# Altium PCB programmer.PcbDoc
Units mil, origin at the board's own origin, x right, y up, seen from the top; angles counter-clockwise.
Board outline 1900 x 1900 mil, 2 copper layers (Top Layer, Bottom Layer); 34 components, 39 nets, 151 pads, 49 vias.
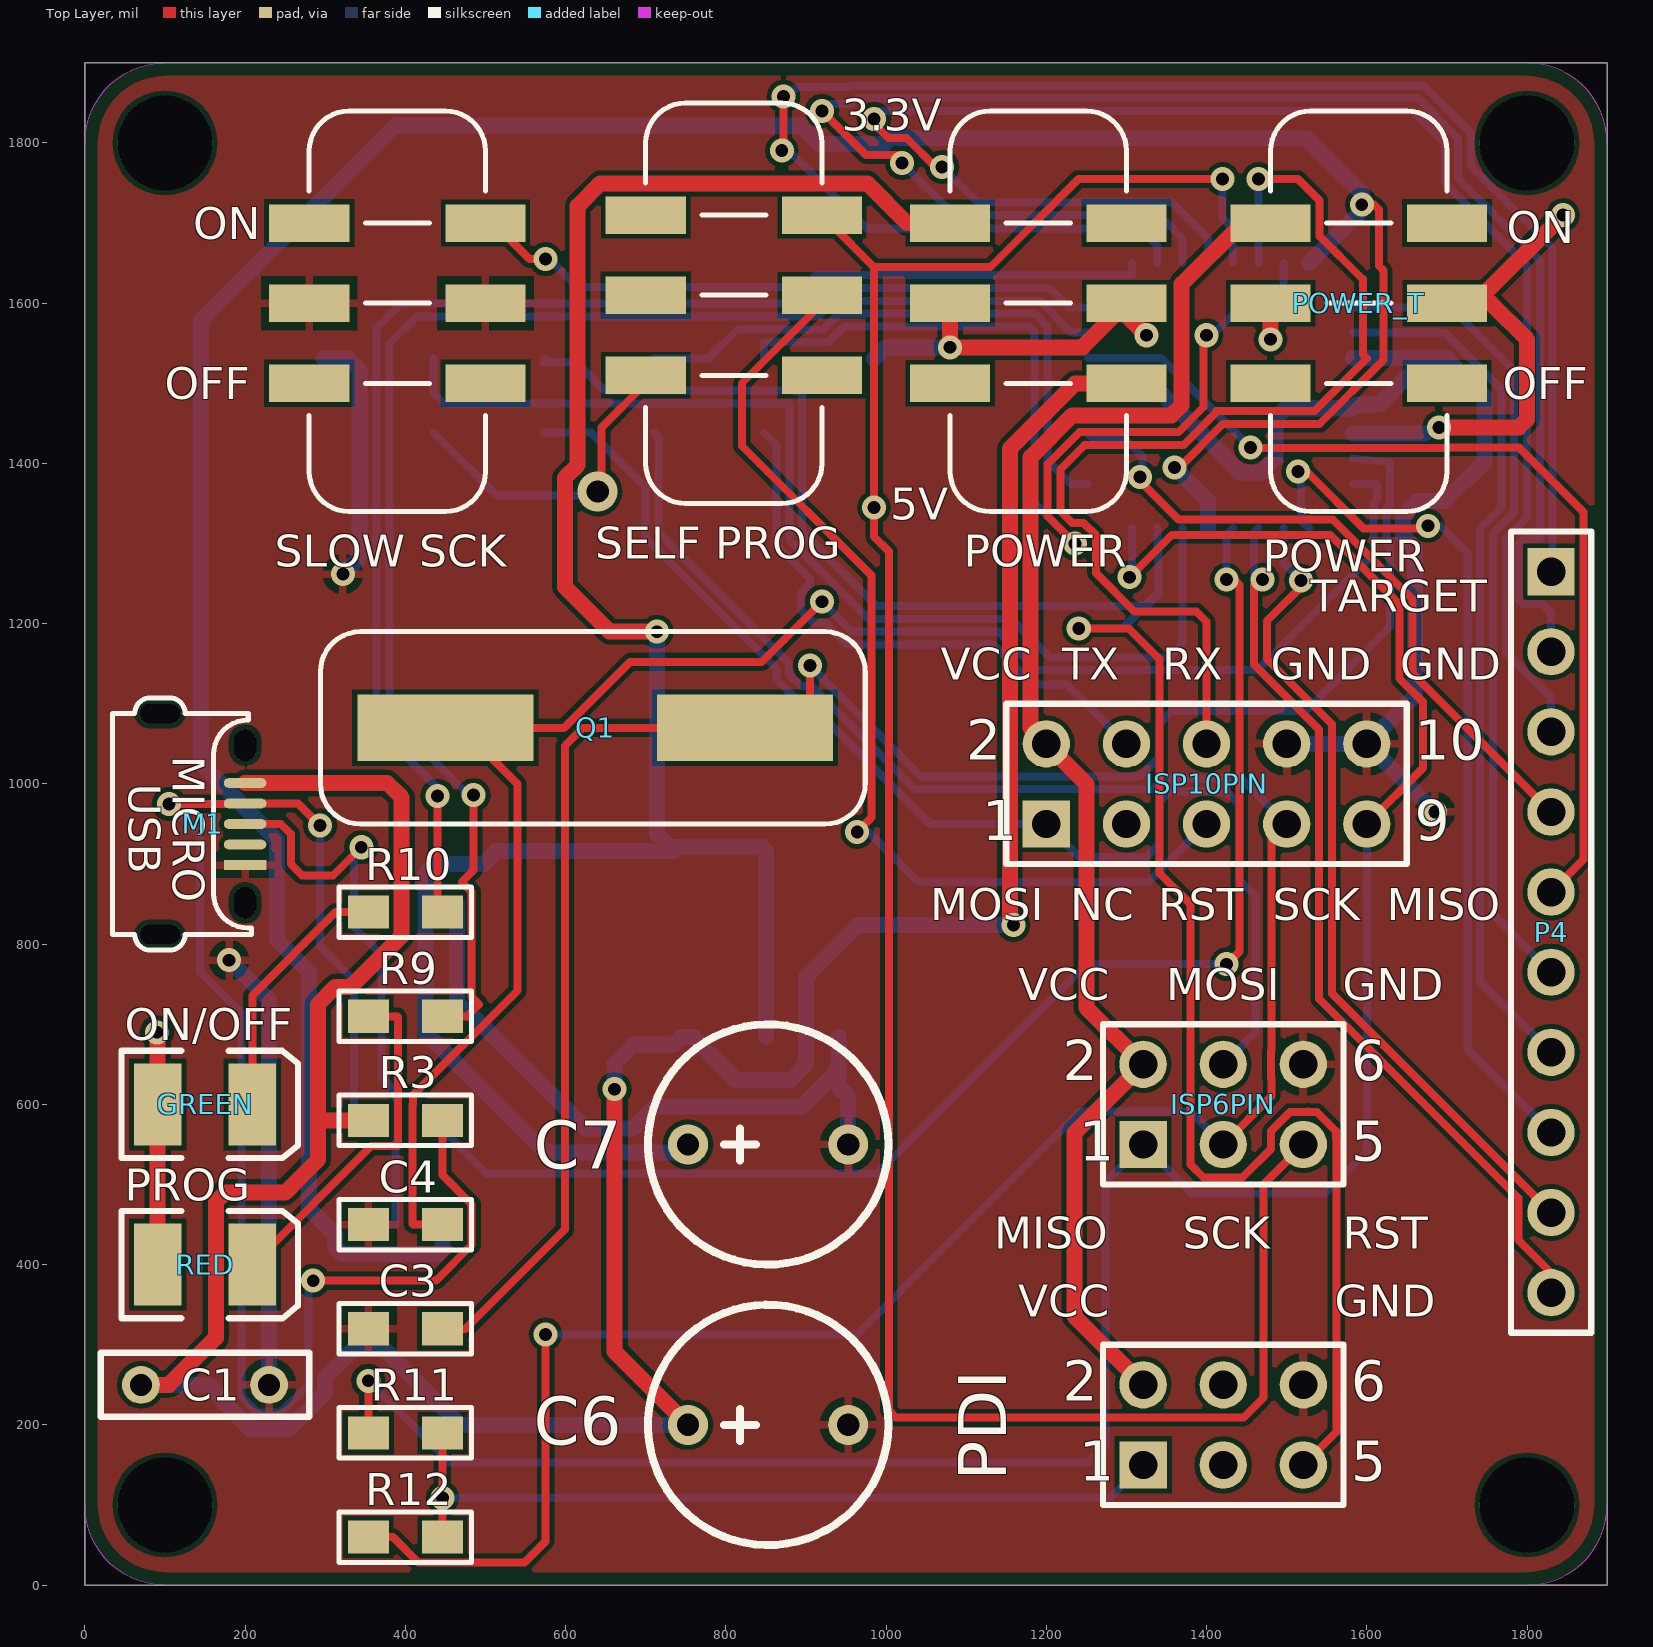
[diagram p0: Top Layer view]
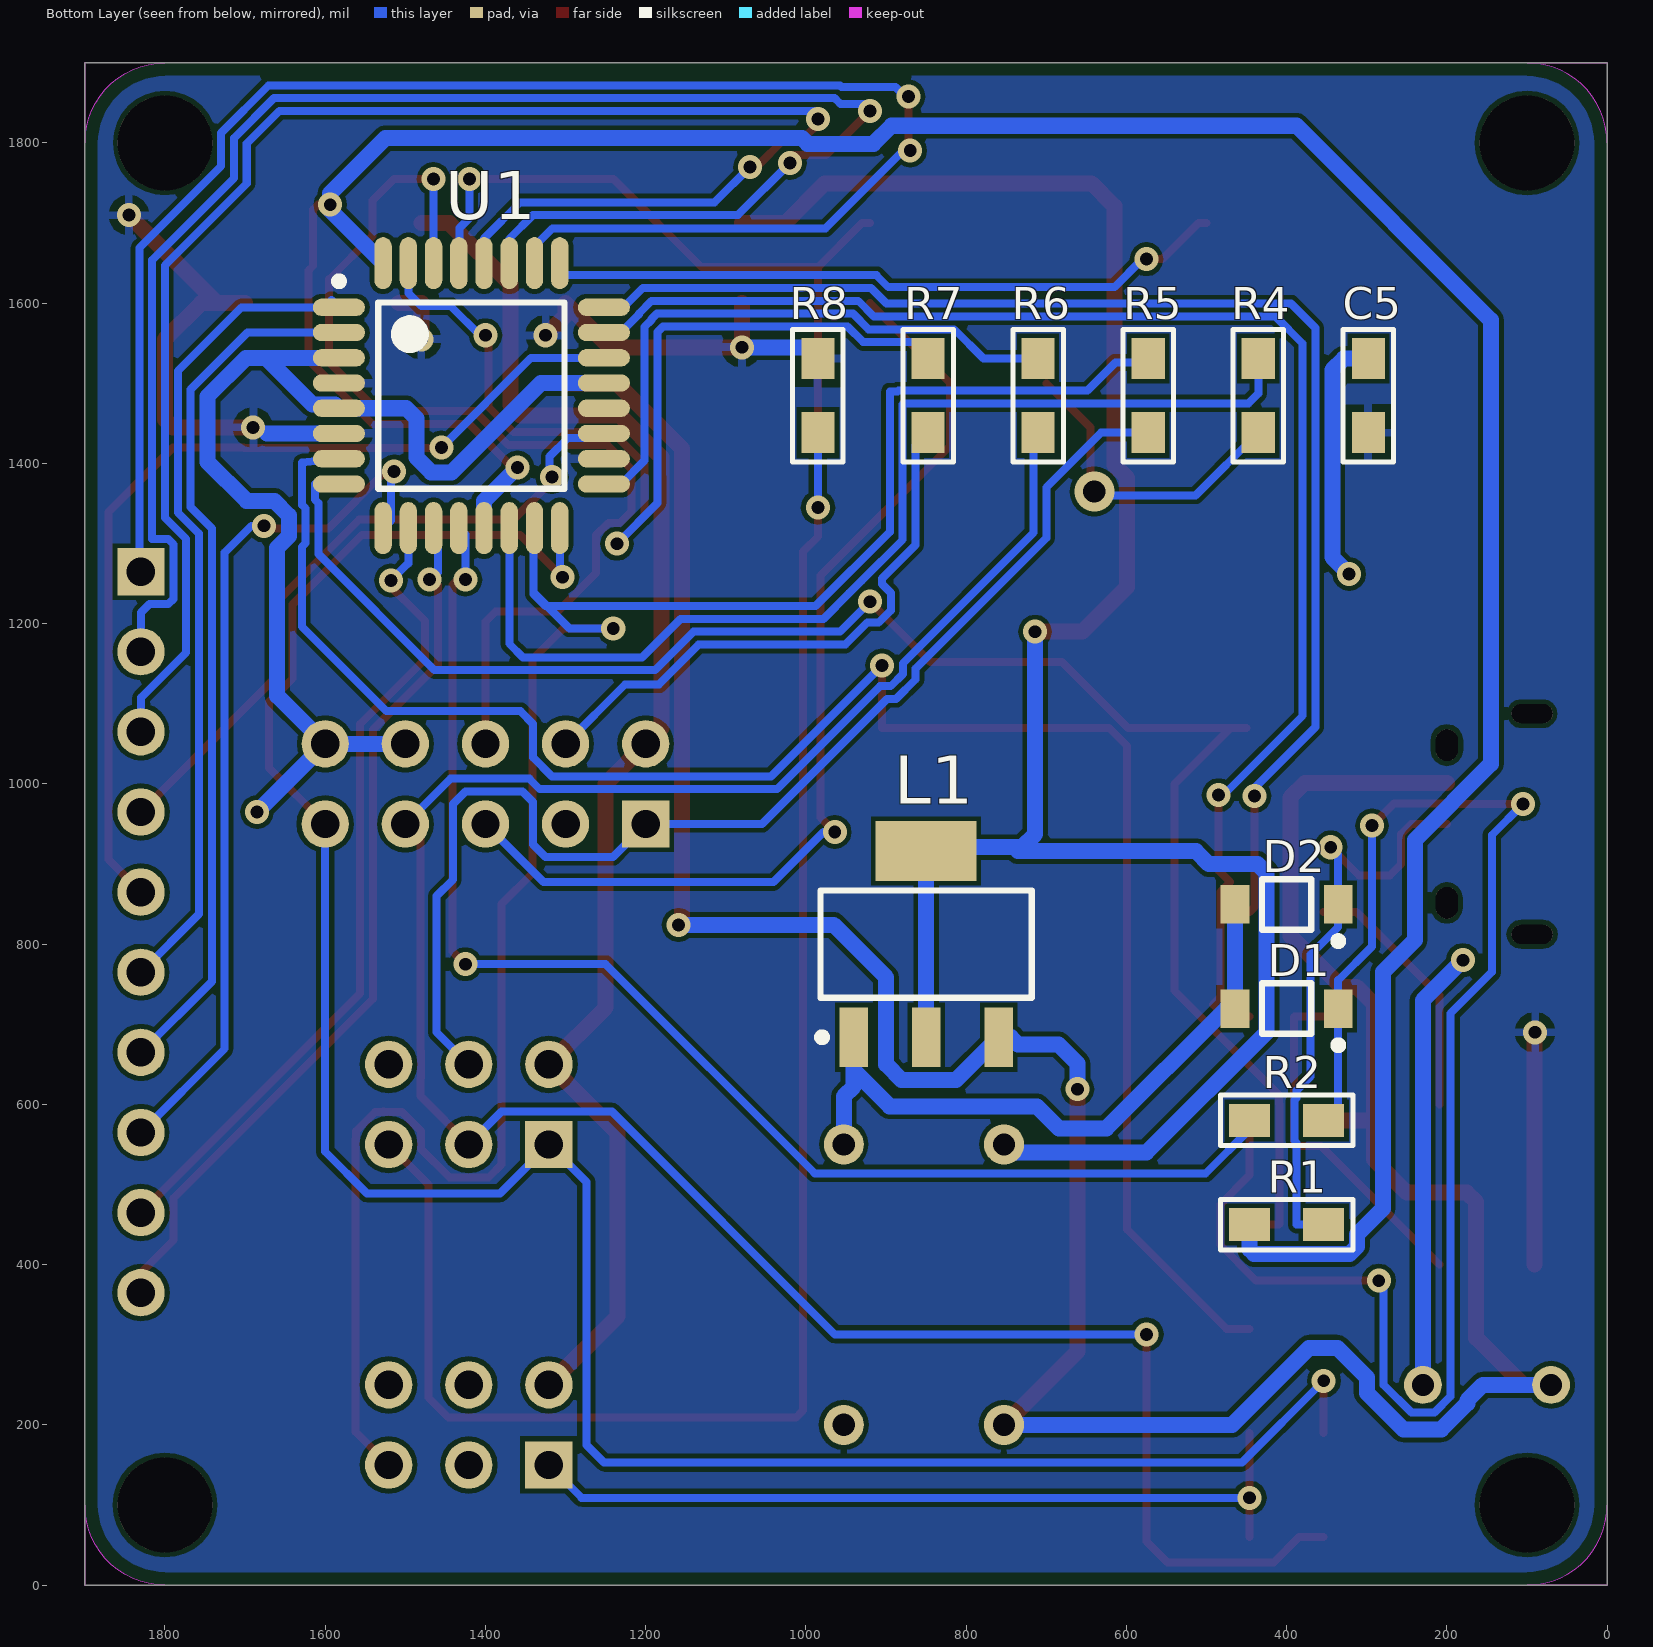
[diagram p1: Bottom Layer view, seen from below]

## Layer stack, top to bottom
Top Solder: solder mask 0.4, Solder Resist, Dk 3.5
Top Layer: signal copper 1.4
Dielectric 1: dielectric 12.6, FR-4, Dk 4.8
Bottom Layer: signal copper 1.4
Bottom Solder: solder mask 0.4, Solder Resist, Dk 3.5

## Board outline
0,0 0,1900 1900,1900 1900,0
cut-out: 0,1800 cw(c100,1800) 100,1900 0,1900
cut-out: 1900,1800 ccw(c1800,1800) 1800,1900 1900,1900
cut-out: 1800,0 ccw(c1800,100) 1900,100 1900,0
cut-out: 100,0 cw(c100,100) 0,100 0,0

## Design rules (kind name [scope] priority, off if disabled: settings)
BoardOutlineClearance [All] p1: gap=16
Clearance [All] p1: gap=6
HoleSize [All] p1: absolutevalues=TRUE maxlimit=248.03 minlimit=11.81 maxpercent=80.000 minpercent=20.000
MinimumAnnularRing [All] p1: minimumring=6
MinimumSolderMaskSliver [All] p1: minsoldermaskwidth=5
PolygonConnect [All] p1: connectstyle=Relief reliefconductorwidth=10 reliefentries=4 polygonreliefangle="90 Angle" airgapwidth=10
RoutingVias [All] p1: holewidth=16 width=30 viastyle="Through Hole" minholewidth=16 minwidth=30 maxholewidth=28 maxwidth=50
SilkToSilkClearance [All] p1: silktosilkclearance=0
SolderMaskExpansion [All] p1: expansion=4
Width [All] p1: maxlimit=30 minlimit=6 preferedwidth=10
27 further rules are at their usual default settings.

## Components (designator, comment, footprint, x,y, rotation, side; value= is the part's Value field where it differs from the comment)
C1 "CAP" CAP4 150,250 r0 top
C3 "CAP" 0805 400,320 r180 top
C4 "CAP" 0805 400,450 r180 top
C5 "CAP" 0805 298,1484.65 r90 bottom
C6 "CAP5" CAP5 852.76,200 r180 top
C7 "CAP5" CAP5 852.76,550 r180 top
D1 "3.6V" ONSC-SOD-123-2-425-04_V 400,719.55 r0 bottom
D2 "3.6V" ONSC-SOD-123-2-425-04_V 400,849.55 r0 bottom
GREEN "LED3" 3.5X2.8X1.9 150,600 r0 top
ISP6PIN "Header 3X2" HDR2X3 1320.83,550 r0 top
ISP10PIN "Header 5X2" HDR2X5 1200,950 r0 top
L1 "AZ1117CH" SOT-223-DB3_L 850,800 r90 bottom
M1 "uUSB_I" MICROUSB_B 200,950 r270 top
P4 "Header 10" HDR1X10 1830,1265 r270 top
PDI "Header 3X2" HDR2X3 1320.83,150 r0 top
POWER "TOGGLE SWITCH" "TOGGLE SWITCH" 1300,1700 r270 top
POWER_T "TOGGLE SWITCH" "TOGGLE SWITCH" 1700,1700 r270 top
Q1 "XTAL" CRYSTAL 824,1070 r180 top
R1 "RES" 0805 400,450 r0 bottom
R2 "RES" 0805 400,580 r0 bottom
R3 "RES" 0805 400,580 r0 top
R4 "RES" 0805 435.4,1484.65 r90 bottom
R5 "RES" 0805 572.8,1484.65 r90 bottom
R6 "RES" 0805 710.2,1484.65 r90 bottom
R7 "RES" 0805 847.6,1484.65 r90 bottom
R8 "RES" 0805 985,1484.65 r90 bottom
R9 "RES" 0805 400,710 r0 top
R10 "RES" 0805 400,840 r0 top
R11 "RES" 0805 400,190 r180 top
R12 "RES" 0805 400,60 r180 top
RED "LED3" 3.5X2.8X1.9 150,400 r0 top
"SELF PROG" "TOGGLE SWITCH" "TOGGLE SWITCH" 920,1710 r270 top
"SLOW SCK" "TOGGLE SWITCH" "TOGGLE SWITCH" 500,1700 r270 top
U1 "ATmega8-16AI" 32A_N 1417.49,1484.65 r180 bottom

## Footprints (in the part's own frame and the unit in brackets; to place one, negate y for a bottom-side part, rotate by r counter-clockwise, add the part's x,y. Pads: shape width x height; smd on the part's side, far side on the other; paste and mask are expansions set on the pad)
3.5X2.8X1.9 [mm] "SM LED; 2 C-Bend Leads; Body 3.5 x 2.8 x 1.9 mm, inc leads (LxWxH typ)"
  rect 1.5x2.6 smd: 1(-1.5,0) 2(1.5,0)
  silkscreen extent -2.65,-1.7 2.95,1.7
32A_N [mm] "Thin QFP, 32-Leads, Body 7x7mm, Pitch 0.8mm, IPC Medium Density"
  oval 1.65x0.55 smd: 1(-4.2,2.8) 2(-4.2,2) 3(-4.2,1.2) 4(-4.2,0.4) 5(-4.2,-0.4) 6(-4.2,-1.2) 7(-4.2,-2) 8(-4.2,-2.8) 17(4.2,-2.8) 18(4.2,-2) 19(4.2,-1.2) 20(4.2,-0.4) 21(4.2,0.4) 22(4.2,1.2) 23(4.2,2) 24(4.2,2.8)
  oval 0.55x1.65 smd: 9(-2.8,-4.2) 10(-2,-4.2) 11(-1.2,-4.2) 12(-0.4,-4.2) 13(0.4,-4.2) 14(1.2,-4.2) 15(2,-4.2) 16(2.8,-4.2) 25(2.8,4.2) 26(2,4.2) 27(1.2,4.2) 28(0.4,4.2) 29(-0.4,4.2) 30(-1.2,4.2) 31(-2,4.2) 32(-2.8,4.2)
  silkscreen extent -4.33,-2.95 2.95,3.75, body extent -3.5,-3.5 3.5,3.5, height 1.2
0805 [mm]
  rect 1.3x1.05 smd: 1(-1.175,0) 2(1.175,0)
  silkscreen extent -2.1,-0.8 2.1,0.8
CAP4 [mm] "Radial Cap, Thru-Hole; 2 Leads; 4mm Pin Spacing"
  round 1.2 hole 0.7: 1(-2.032,0) 2(2.032,0)
  silkscreen extent -3.3,-1.02 3.3,1.02
CAP5 [mil]
  round 50 hole 28: 1(-100,0) 2(100,0)
  silkscreen extent -150,-150 150,150
CRYSTAL [mil]
  rect 220x83 smd: 1(0,0) 2(374,0)
  silkscreen extent -150,-120 530,120
HDR1X10 [mm] "Connector; Header; 10 Position"
  rect 1.5x1.5 hole 0.9: 1(0,0)
  round 1.5 hole 0.9: 2(2.54,0) 3(5.08,0) 4(7.62,0) 5(10.16,0) 6(12.7,0) 7(15.24,0) 8(17.78,0) 9(20.32,0) 10(22.86,0)
  silkscreen extent -1.27,-1.27 24.13,1.27
HDR2X3 [mm] "Connector; Header; 3x2 Position"
  rect 1.5x1.5 hole 0.9: 1(0,0)
  round 1.5 hole 0.9: 2(0,2.54) 3(2.54,0) 4(2.54,2.54) 5(5.08,0) 6(5.08,2.54)
  silkscreen extent -1.27,-1.27 6.35,3.81
HDR2X5 [mm] "Connector; Header; 5x2 Position"
  rect 1.5x1.5 hole 0.9: 1(0,0)
  round 1.5 hole 0.9: 2(0,2.54) 3(2.54,0) 4(2.54,2.54) 5(5.08,0) 6(5.08,2.54) 7(7.62,0) 8(7.62,2.54) 9(10.16,0) 10(10.16,2.54)
  silkscreen extent -1.27,-1.27 11.43,3.81
MICROUSB_B [mm] "Micro USB Type B Footprint"
  oval 0.305x1.35 smd mask+0.102: 1:VCC(-1.3,0) 2:RX(-0.65,0) 3:TX(0,0) 4:NC(0.65,0)
  rect 0.305x1.35 smd mask+0.102: 5:GND(1.3,0)
  rrect100% 0.6x1.3 hole 0.6 slot 1.3 at 90 deg unplated: hole(-3.5,-2.7) hole(3.5,-2.7)
  rrect100% 1x0.7 hole 0.7 slot 1 at 0 deg unplated: hole(-2.5,0) hole(2.5,0)
  silkscreen extent -4,-4.2 4,0.2
ONSC-SOD-123-2-425-04_V [mm] "SOD, 2-Leads, Body 2.69x1.6mm"
  rect 0.91x1.22 smd: 1(-1.635,0) 2(1.635,0)
  silkscreen extent -1.76,-0.8 0.78,1.28, body extent -1.35,-0.8 1.35,0.8, height 1.35
SOT-223-DB3_L [mm] "SOT223, 4-Leads, Body 6.5x3.5mm, Pitch 2.3mm, Lead Span 7mm, IPC High Density"
  rect 1.9x0.9 smd: 1(-2.95,2.3) 2(-2.95,0) 3(-2.95,-2.3)
  rect 1.9x3.2 smd: 4(2.95,0)
  silkscreen extent -3.07,-3.35 1.7,3.43, body extent -1.85,-3.35 1.85,3.35, height 1.8
"TOGGLE SWITCH" [mil]
  rect 47x100 smd: 1(0,0) 1(0,-220) 2(100,0) 2(100,-220) 3(200,0)
  rect 47x100 smd mask+4: 3(200,-220)
  silkscreen extent -140,-220 360,0

## Part data
C1 C3 C4 C5: "Capacitor - Imperial Units"
C6 C7: "Aluminum Capacitor - Imperial Units"
D1 D2: library part MMSZ4685T1G, "Zener Voltage Regulator, 500 mW, 2-Pin SOD-123, Pb-Free, Tape and Reel"
GREEN RED: "Typical BLUE SiC LED"
ISP6PIN PDI: "Header, 3-Pin, Dual row"
ISP10PIN: "Header, 5-Pin, Dual row"
L1: "Low Dropout Voltage Regulator - Imperial Units"
M1: "Micro USB Type B - Imperial Units"
P4: "Header, 10-Pin"
POWER POWER_T "SELF PROG" "SLOW SCK": "Toggle Switch - Imperial Units"
Q1: "Crystal Oscillator - Imperial Units"
R1 R2 R3 R4 R5 R6 R7 R8 R9 R10 R11 R12: "Resistor - Imperial Units"
U1: "8-Bit AVR Microcontroller with 8K Bytes of In-System Programmable Flash Memory"

## Free pads (board coordinates)
  round 118.11 hole 118.11 unplated: Hole(100,100) Hole(100,1800) Hole(1800,100) Hole(1800,1800)

## Via types
v1: diameter 30, hole 16, Top Layer to Bottom Layer, 48 vias
v2: diameter 50, hole 28, Top Layer to Bottom Layer, 1 vias

## Nets (pads, with @x,y where several pads share a name; then routed paths per layer and width w, separated by ;. In a path a pad name is that pad's centre, name@x,y a point inside that pad or via, vN(x,y) a via of type N, cw(c..) or ccw(c..) an arc to the next point about the centre after c; other vN are vias at no path point)
3.3V: C7.2 L1.2 L1.4 POWER.1 | length 2661.4
  Top Layer w20: v1(714,1190) 655,1190 599,1246 599,1381.98 615,1397.98 615,1721.13 643.37,1749.5 976.63,1749.5 1026.13,1700 POWER.1@1080,1700
  Bottom Layer w20: v1(714,1190) 714,937.5 730.36,921.14 845,921.14 L1.4 L1.2 ; 735.36,916.14 513.14,916.14 497,900 436.19,900 425,888.81 425,690 575,540 742.76,540 C7.2
5V: C1.1 C6.2 L1.3 M1.1:VCC POWER.3 R3.1 | length 3952.3
  Top Layer w20: C1.1 105,250 163.53,308.53 163.53,478.53 175,490 250,490 291,531 291,580 ; M1.1:VCC 377.32,1001.18 395.33,983.17 395.33,810.33 331.67,746.67 312.67,746.67 291,725 291,580 ; R3.1 291,580 ; v1(661,619) 661,291.76 C6.2 ; v1(1159,824) 1154.47,828.53 1154.47,1418.59 1235.88,1500 POWER.3@1300,1500
  Bottom Layer w20: C1.1 155,250 174.38,230.62 174.38,226.96 206.96,194.38 254.38,194.38 300,240 300,259.24 336.76,296 372,296 468,200 C6.2 ; v1(661,619) 661,651 685,675 735.45,675 744.31,683.86 L1.3 812.85,630.46 880.46,630.46 900,650 900,758.5 965.5,824 v1(1159,824)
DATA+: R2.2 U1.12 | length 1687.2
  Top Layer w10: v1(1425,775) 1441,791 1441,1248.24 1434.24,1255 v1(1425,1255)
  Bottom Layer w10: R2.2 446.26,568.74 501,514 989,514 1250,775 v1(1425,775) ; v1(1425,1255) 1425,1311.06 U1.12
DATA-: R1.2 U1.13 U1.32 | length 3724.7
  Top Layer w10: v1(1360,1395) 1366.08,1395 1420.58,1449.5 1541.18,1449.5 1621,1529.32 1621,1640.77 1615,1646.77 1615,1716.78 1608.85,1722.93 v1(1593.78,1722.93)
  Bottom Layer w20: R1.2 446.26,419 440.59,413.33 321.52,413.33 312.15,422.7 312.15,437.85 280,470 280,765 240,805 240,930 145,1025 145,1579 387.49,1821.49 893.21,1821.49 915.7,1799 997.84,1799 1004.84,1806 1525,1806 1593.78,1737.22 v1(1593.78,1722.93) 1593.78,1716.06 U1.32 ; v1(1360,1395) 1401.74,1353.26 U1.13
GND: "SLOW SCK.2" C1.2 C3.2 C4.2 C5.2 C6.1 C7.1 D1.2 D2.2 ISP6PIN.6 ISP10PIN.8 ISP10PIN.10 L1.1 M1.5:GND PDI.6 U1.3 U1.5 U1.21 | length 3189.3
  Bottom Layer w20: v1(180,780) 230,730 C1.2 ; C5.2 329,1530.91 343,1516.91 343,1283 v1(322,1262) ; D2.2 D1.2 475.45,719.55 625,570 684.25,570 711.79,597.54 895.54,597.54 940.55,642.55 ; L1.1 940.55,642.55 ; C7.1 952.76,610 940.55,622.2 940.55,642.55 ; U1.21 1330.77,1500.39 1442.16,1389 1467.84,1389 1486,1407.16 1486,1456 1498.9,1468.9 U1.5 1587.51,1473.57 1615.61,1473.57 1673.93,1531.89 ; ISP10PIN.8 ISP10PIN.10 ; U1.3 1673.93,1531.89 ; v1(1685,965) ISP10PIN.10 ; ISP10PIN.10 1660,1110 1660,1294.68 1645.31,1309.37 1645.31,1335.05 1663.47,1353.21 1698.21,1353.21 1747,1402 1747,1483.57 1698.68,1531.89 1673.93,1531.89
MISO: ISP6PIN.1 ISP10PIN.9 R11.2 U1.16 | length 2938.6
  Top Layer w10: R11.2 v1(353.74,255) ; v1(1304,1258) 1357,1311 1554,1311 1641,1224 1641,1131.37 1670,1102.37 1670,1020 ISP10PIN.9
  Bottom Layer w10: v1(353.74,255) 455.74,153 1252,153 1274,175 1274,503.17 ISP6PIN.1 1381.83,489 1548,489 1600,541 ISP10PIN.9 ; v1(1304,1258) 1307.25,1261.25 U1.16
MOSI: PDI.5 R5.2 U1.15 | length 2652.8
  Top Layer w10: v1(1240.5,1194) 1303,1194 1341,1156 1341,889 1380,850 1380,525 1396,509 1445,509 1480.3,544.3 1480.3,566.79 1504.04,590.53 1526.53,590.53 1527,591 1527.47,590.53 1537.61,590.53 1561.35,566.79 1561.35,556.65 1562,556 1562,191.17 PDI.5
  Bottom Layer w10: R5.2 572.8,1526 613.5,1526 648.52,1490.98 884.63,1490.98 885.9,1489.71 895.27,1489.71 895.27,1314.73 988,1222 1323,1222 ; v1(1240.5,1194) 1295,1194 1323,1222 ; U1.15 U1.15@1338.75,1296 ; 1323,1222 1325,1222 1340,1237 1340,1239 ; 1323,1222 1340,1239 ; U1.15@1338.75,1296 U1.15@1340,1294.75 ; U1.15@1338.75,1296 1340,1296 U1.15@1340,1294.75 ; 1340,1239 U1.15@1340,1294.75
NetC3_1: C3.1 Q1.1 U1.7 | length 2339.3
  Top Layer w10: C3.1 475.27,320 599,443.73 599,1047.5 621.5,1070 Q1.1 905,1070 v1(905,1148)
  Bottom Layer w10: v1(905,1148) 1043.53,1009.47 1316.79,1009.47 1340.53,1033.21 1340.53,1075 1356.53,1091 1523.74,1091 1629,1196.26 1629,1295.98 1624.31,1300.67 1624.31,1343.75 1629,1348.44 1629,1400.91 U1.7
NetC4_1: C4.1 Q1.2 U1.8 | length 2178.6
  Top Layer w10: C4.1 410,450 409,451 409,600 409.67,600.67 409.67,611.59 540,741.92 540,1000 Q1.2@470,1070 ; Q1.2 Q1.2@470,1070 ; v1(920.01,1227.5) 844.79,1152.28 680.28,1152.28 598,1070 Q1.2@470,1070
  Bottom Layer w10: v1(920.01,1227.5) 957.51,1190 1140.5,1190 1188.5,1142 1463.5,1142 1608.31,1286.81 1608.31,1350.38 1613,1355.06 1613,1374.41 U1.8
NetD1_1: D1.1 M1.2:RX R2.1 R3.2 | length 1995.5
  Top Layer w10: v1(105,975) 199.41,975 M1.2:RX 265.91,975.59 v1(293.5,948) ; v1(285,380) 438.08,380 482.85,424.77 482.85,475.23 446.26,511.82 R3.2
  Bottom Layer w10: v1(105,975) 144,936 144,765.09 195.38,713.71 195.38,235.66 215.66,215.38 244.34,215.38 279,250.04 279,374 v1(285,380) ; v1(293.5,948) 293.5,797.13 335.63,755 D1.1 335.63,598.11 R2.1
NetD2_1: D2.1 M1.3:TX R1.1 | length 740.4
  Top Layer w10: M1.3:TX 244.5,950 257,937.5 257,900 271,886 310,886 v1(345,921)
  Bottom Layer w10: v1(345,921) 335.63,911.63 D2.1 335.63,821.37 370,787 370,635 387.5,617.5 387.5,608.06 390.33,605.23 390.33,554.77 387.5,551.94 387.5,450 R1.1
NetGREEN_2: GREEN.2 R10.1 | length 323.8
  Top Layer w10: GREEN.2 209.06,736.06 313,840 R10.1
NetPDI_1: PDI.1 R11.1 R12.1 | length 1021.5
  Top Layer w10: R12.1 v1(446.26,109) R11.1
  Bottom Layer w10: v1(446.26,109) 1279.83,109 PDI.1
NetR6_2: R6.2 U1.17 | length 751.6
  Bottom Layer w10: R6.2 778.41,1530.91 815,1567.5 921.91,1567.5 941.41,1587 1185.99,1587 1192.65,1580.34 1192.65,1579.21 1201.34,1570.53 1201.34,1403.66 1230.59,1374.41 U1.17
NetR9_1: R9.1 RED.2 | length 441.3
  Top Layer w10: RED.2 357.06,548 390,548 391,549 391,709 390,710 R9.1
NetR9_2: R9.2 U1.23 | length 1857.9
  Top Layer w10: R9.2 477,710 492,725 482.85,734.15 482.85,865.23 470.46,877.62 485,892.16 484,893.16 486,895.16 485,896.16 v1(485,986)
  Bottom Layer w10: v1(485,986) 485,981.86 484.14,981 380,1085.14 380,1549.5 414,1583.5 915.28,1583.5 934.78,1603 1192.62,1603 1208.65,1586.96 1208.65,1585.84 1231.11,1563.39 U1.23
NetR10_2: R10.2 U1.24 | length 1681.9
  Top Layer w10: v1(440,985) 440,846.26 R10.2
  Bottom Layer w10: v1(440,985) 440,995 364,1071 364,1569 394.5,1599.5 899.28,1599.5 918.78,1619 1203.63,1619 1227.75,1594.88 U1.24
PC3: P4.1 U1.26 | length 2091.1
  Top Layer w10: v1(869.86,1790.49) 872,1788.35 v1(872,1858)
  Bottom Layer w10: v1(869.86,1790.49) 878.65,1790.49 975.66,1693.48 1316.29,1693.48 1338.75,1671.03 U1.26 ; v1(872,1858) 876.41,1858 888.41,1870 955.6,1870 957.6,1872 1670.56,1872 1729.94,1812.61 1729.94,1770.98 1832,1668.93 1832,1267 P4.1
PC4: P4.2 U1.27 | length 2107.5
  Top Layer w10: v1(920,1840) 975,1785 1020,1785 v1(1020,1775)
  Bottom Layer w10: v1(920,1840) 928.7,1848.7 956.93,1848.7 ; 959,1850.77 964.23,1856 1663.93,1856 1713.94,1805.98 1713.94,1756.06 1816,1654 1816,1305.53 1795.92,1305.53 1789.47,1299.08 1789.47,1230.92 1795.92,1224.47 1819.36,1224.47 1830,1213.83 P4.2 ; v1(1020,1775) 1085,1710 1340.6,1710 1370.24,1680.36 U1.27
PC5: P4.3 U1.28 | length 2080.8
  Top Layer w10: v1(985,1830) 982,1827 1003,1806 1025.77,1806 1061.77,1770 v1(1070,1770)
  Bottom Layer w10: v1@980,1835 982,1837 v1@982,1833 ; v1(985,1830) v1@982,1833 ; v1@985,1833 v1@984,1834 ; v1(1070,1770) 1114,1726 1356.63,1726 1401.74,1680.89 U1.28 ; P4.3 1830,1107.69 1773.47,1164.21 1773.47,1305.71 1800,1332.24 1800,1647.37 1697.94,1749.43 1697.94,1799.36 1657.3,1840 990,1840 v1@984,1834 ; v1@982,1833 v1@982,1834 ; v1@982,1834 983,1833 v1@984,1834 ; v1@982,1834 982,1836 v1@984,1834
PC6: P4.4 U1.19 | length 850.1
  Top Layer w10: v1(1317,1383) 1317,1378 1365,1330 1557.63,1330 1657,1230.63 1657,1138 P4.4
  Bottom Layer w10: U1.19 1258.05,1431.48 1297.3,1431.48 1320,1408.78 1320,1386 v1(1317,1383)
PC7: P4.5 U1.22 | length 1190.2
  Top Layer w10: v1(1455,1420) 1456,1419 1700.77,1419 1701.77,1420 1790,1420 1870.53,1339.47 1870.53,905.53 P4.5
  Bottom Layer w10: U1.22 1343.11,1531.89 v1(1455,1420)
PD3: P4.6 U1.1 | length 1038.4
  Bottom Layer w10: U1.1@1591.96,1604 U1.1 1704.53,1594.88 1784,1515.41 1784,1338.87 1757.47,1312.34 1757.47,837.53 P4.6
PD4: P4.7 U1.2 | length 1089.5
  Bottom Layer w10: U1.2 1696.88,1563.39 1768,1492.27 1768,1345.49 1741.47,1318.97 1741.47,753.53 P4.7
PD5: P4.8 U1.9 | length 1101.5
  Top Layer w10: v1(1514,1390) 1525,1390 1596.03,1318.97 1676.31,1318.97 v1(1676.31,1322.21)
  Bottom Layer w10: v1(1514,1390) 1518.05,1385.95 1518.05,1328.96 U1.9 ; v1(1676.31,1322.21) 1692.14,1322.21 1725.47,1288.87 1725.47,669.53 P4.8
PD6: P4.9 U1.10 | length 1039.7
  Top Layer w10: v1(1518,1254) 1526,1254 1475.24,1203.24 1475.24,1155.82 1556.53,1074.53 1556.53,738.47 P4.9
  Bottom Layer w10: U1.10 1496.23,1275 1497,1275 v1(1518,1254)
PD7: P4.10 U1.11 | length 1122.3
  Top Layer w10: v1(1470,1255) 1466,1255 1459.24,1248.24 1459.24,1149.19 1540.53,1067.9 1540.53,731.85 1789.47,482.9 1789.47,430.53 1830,390 P4.10
  Bottom Layer w10: U1.11 1459.24,1313.8 1459.24,1264.19 1460.81,1264.19 v1(1470,1255)
PMOSI: ISP6PIN.4 ISP10PIN.1 R5.1 | length 1553.1
  Bottom Layer w10: R5.1 631.61,1438.39 700,1370 700,1306.98 863,1143.98 863,1130.6 887.6,1106 899,1106 1055,950 ISP10PIN.1 1241,909 1325,909 1340.53,924.53 1340.53,977.47 1353.58,990.53 1425,990.53 1440.53,975 1440.53,880.47 1461,860 1461,690.17 ISP6PIN.4
PRESET: "SELF PROG.2" ISP10PIN.5 | length 1267.9
  Top Layer w10: 920,1600 820,1500 820,1422 982,1260 982,958 v1(964,940)
  Bottom Layer w10: v1(964,940) 978,940 1040.53,877.47 1327.47,877.47 ISP10PIN.5
PSCK: ISP6PIN.3 ISP10PIN.7 R6.1 R12.2 | length 2995.7
  Top Layer w10: R12.2 384.44,60 416.11,28.33 548.83,28.33 575,54.5 v1(575,313) ; ISP6PIN.3 1481.22,610.39 1481.22,632.3 1480.3,633.21 1480.3,666.79 1481.22,667.7 1481.22,931.22 ISP10PIN.7
  Bottom Layer w10: v1(575,313) 964,313 1242,591 1379.83,591 ISP6PIN.3 ; R6.1 716,1432.59 716,1313.61 879,1150.61 879,1137.23 894.23,1122 907.61,1122 1036.14,993.47 1332.23,993.47 1345.29,1006.53 1443.47,1006.53 ISP10PIN.7
PSS: "SELF PROG.3" R4.1 | length 401.9
  Top Layer w10: v2(640,1365) 645,1365 645,1445 700,1500
  Bottom Layer w10: R4.1 513.79,1360 635,1360 v2(640,1365)
PTX: ISP10PIN.4 R7.1 | length 725.1
  Bottom Layer w10: R7.1 863.27,1422.71 863.27,1298.24 905.1,1256.41 905.1,1249.36 894.01,1238.27 894.01,1216.73 909.24,1201.5 923.38,1201.5 950.88,1174 1133.87,1174 1183.49,1124.38 1225.62,1124.38 ISP10PIN.4
PVCC: ISP6PIN.2 ISP10PIN.2 PDI.2 POWER_T.1 | length 1796.1
  Top Layer w20: PDI.2 1235,335.83 1235,564.17 ISP6PIN.2 1250,720.83 1250,1000 ISP10PIN.2 1180.47,1069.53 1180.47,1407.82 1232.65,1460 1356.13,1460 1369,1472.87 1369,1624 1445,1700 POWER_T.1@1480,1700
RESET: "SELF PROG.1" ISP6PIN.5 R8.1 U1.29 | length 3024.7
  Top Layer w10: 920,1700 930,1700 985,1645 ; v1(1420,1755) 1240,1755 1130,1645 985,1645 ; ISP6PIN.5 1471,500.17 1471,234 1446,209 1012.5,209 1003.56,217.94 1003.56,1290 985,1308.56 v1(985,1345) 985,1645
  Bottom Layer w10: v1(985,1345) R8.1 ; v1(1420,1755) 1420,1706.24 1432.24,1694 U1.29
RX: ISP10PIN.6 U1.30 | length 1326.5
  Top Layer w10: ISP10PIN.6 1400,1202.5 1387.5,1215 1310.23,1215 1261.84,1263.39 1261.84,1310.61 1246.61,1325.84 1232.47,1325.84 1217.47,1340.84 1217.47,1392.5 1247.97,1423 1371.45,1423 1412,1463.55 1412,1465.5 1534.56,1465.5 1600,1530.94 1595,1535.94 1595,1630 1541,1684 1541,1728.06 1514.06,1755 v1(1465,1755)
  Bottom Layer w10: U1.30 1465,1650.27 v1(1465,1755)
SLOW_SCK: "SLOW SCK.1" U1.25 | length 861.6
  Top Layer w10: 500,1700 510,1700 555,1655 v1(575,1655)
  Bottom Layer w10: v1(575,1655) 580,1655 615,1620 897.16,1620 912.16,1635 1307.25,1635 U1.25
SS: R4.2 U1.14 | length 1365.1
  Bottom Layer w10: R4.2 435.4,1487.5 447.92,1474.98 878,1474.98 879.27,1473.71 879.27,1304.87 930.64,1253.5 930.78,1253.5 946.01,1238.27 946.01,1238.13 978.14,1206 1156.5,1206 1204.5,1158 1353.24,1158 1370.24,1175 U1.14
TX: R7.2 U1.31 | length 1241.2
  Top Layer w10: v1(1235.84,1299.84) 1201.47,1334.21 1201.47,1399.13 1241.35,1439 1364.83,1439 1396,1470.17 1396,1560 v1(1400,1560)
  Bottom Layer w10: R7.2 847.6,1551.5 928.54,1551.5 948.04,1571 1178.24,1571 1185.34,1563.9 1185.34,1385.11 1185.23,1385 1185.23,1350.45 v1(1235.84,1299.84) ; v1(1400,1560) 1407,1560 1443.27,1596.27 1480,1596.27 1496.23,1612.5 U1.31
VCC: C5.1 GREEN.1 POWER.2 POWER_T.2 R8.2 RED.1 U1.4 U1.6 U1.18 | length 1390.5
  Top Layer w20: v1(90,690) 90,685 90.94,684.06 GREEN.1 RED.1 ; POWER.2@1080,1600 v1(1080,1545) 1245,1545 1300,1600 1300,1585 v1(1325,1560) ; v1(1480,1555) 1480,1600 POWER_T.2@1508.23,1600 ; v1(1690,1445) 1790,1445 1800,1455 1800,1555 1755,1600 POWER_T.2@1735,1600 ; POWER_T.2@1700,1600 POWER_T.2@1735,1600 ; v1(1845,1710) POWER_T.2@1735,1600
  Bottom Layer w20: R8.2 999.09,1545 v1(1080,1545) ; U1.6 1672.4,1437.4
pads on no net: "SLOW SCK.3" ISP10PIN.3 M1.4:NC M1.hole PDI.3 PDI.4 POWER_T.3 U1.20

## Polygon pours and split planes (outlines as drawn)
GND on Top Layer "Top Layer-No Net" (solid, pour order 0): 0,1900 1900,1900 1900,0 0,0
VCC on Bottom Layer "VCC_BOTTOM_LAYER" (solid, pour order 2): 0,1900 1900,1900 1900,0 0,0

## Silkscreen, mask and mechanical layers (free items; w line width, h text height)
Top Overlay:
  text "3.3V" at 945,1815 h40
  text "ON" at 135,1680 h40
  text "ON" at 1775,1675 h40
  text "OFF" at 100,1480 h40
  text "OFF" at 1770,1480 h40
  text "5V" at 1005,1330 h40
  text "POWER" at 1470,1265 h40
  text "TARGET" at 1530,1215 h40
  text "VCC" at 1068.33,1130 h40
  text "TX" at 1220,1130 h40
  text "RX" at 1345,1130 h40
  text "GND" at 1480,1130 h40
  text "GND" at 1641.66,1130 h40
  text "MOSI" at 1055,830 h40
  text "NC" at 1230,830 h40
  text "RST" at 1340,830 h40
  text "SCK" at 1482.5,830 h40
  text "MISO" at 1625,830 h40
  text "VCC" at 1165,730 h40
  text "MOSI" at 1350,730 h40
  text "GND" at 1570,730 h40
  text "ON/OFF" at 50,680 h40
  text "PROG" at 50,480 h40
  text "MISO" at 1135,420 h40
  text "SCK" at 1370,420 h40
  text "RST" at 1570,420 h40
  text "VCC" at 1165,335 h40
  text "GND" at 1560,335 h40
Mechanical 1:
  lines w6.3: 0,88.28 ccw(c68.28,88.28) 20,40 31.72,28.28 ccw(c100,96.57) 100,0 1630,0 1790,0 1811.72,0 ccw(c1811.72,68.28) 1860,20 1871.72,31.72 ccw(c1803.43,100) 1900,100 1900,1490 1900,1800 1900,1811.72 ccw(c1831.72,1811.72) 1880,1860 1868.28,1871.72 ccw(c1800,1803.43) 1800,1900 100,1900 ccw(c100,1803.43) 31.72,1871.72 30,1870 28.28,1868.28 ccw(c96.57,1800) 0,1800 0,1750 0,200 0,120 0,88.28

## Text inside footprints (layer, text, board x,y; h text height)
ISP6PIN: Top Overlay "1" at 1240.83,530 h50; Top Overlay "2" at 1220.83,630 h50; Top Overlay "5" at 1580.83,530 h50; Top Overlay "6" at 1580.83,630 h50
ISP10PIN: Top Overlay "2" at 1100,1030 h50; Top Overlay "1" at 1120,930 h50; Top Overlay "9" at 1660,930 h50; Top Overlay "10" at 1660,1030 h50
M1: Top Overlay "USB" at 55,1000 h40 r270; Top Overlay "MICRO" at 110,1035 h40 r270
PDI: Top Overlay "1" at 1240.83,130 h50; Top Overlay "2" at 1220.83,230 h50; Top Overlay "5" at 1580.83,130 h50; Top Overlay "6" at 1580.83,230 h50